# Altium PCB Main Board ECEshop.PcbDoc
Units mil, origin at the board's own origin, x right, y up, seen from the top; angles counter-clockwise.
Board outline 4000 x 4000 mil, 2 copper layers (Top Layer, Bottom Layer); 59 components, 70 nets, 303 pads, 77 vias.
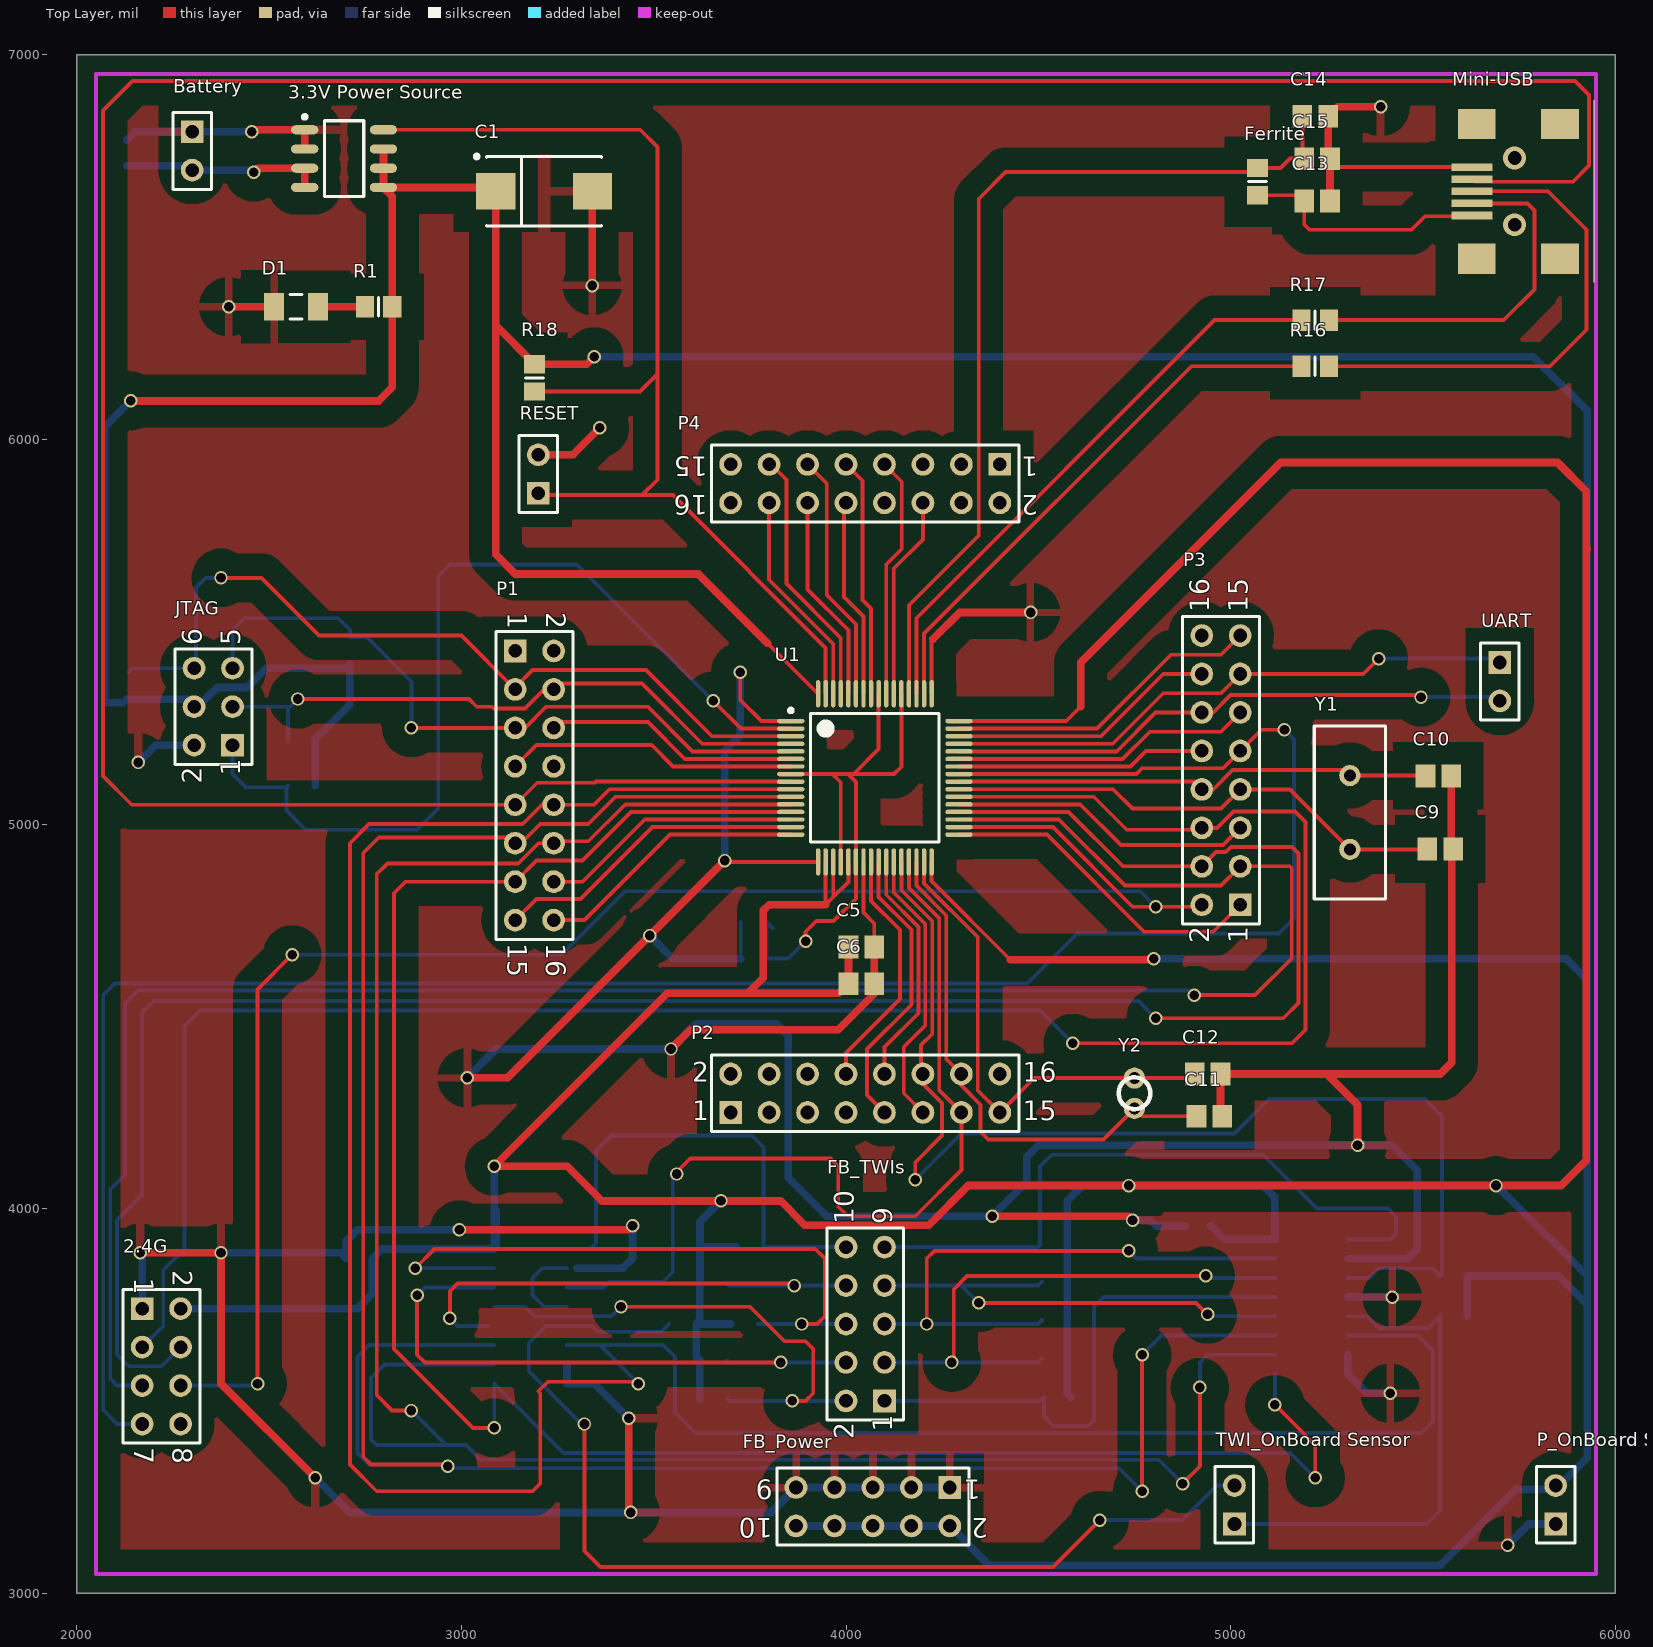
[diagram p0: Top Layer view]
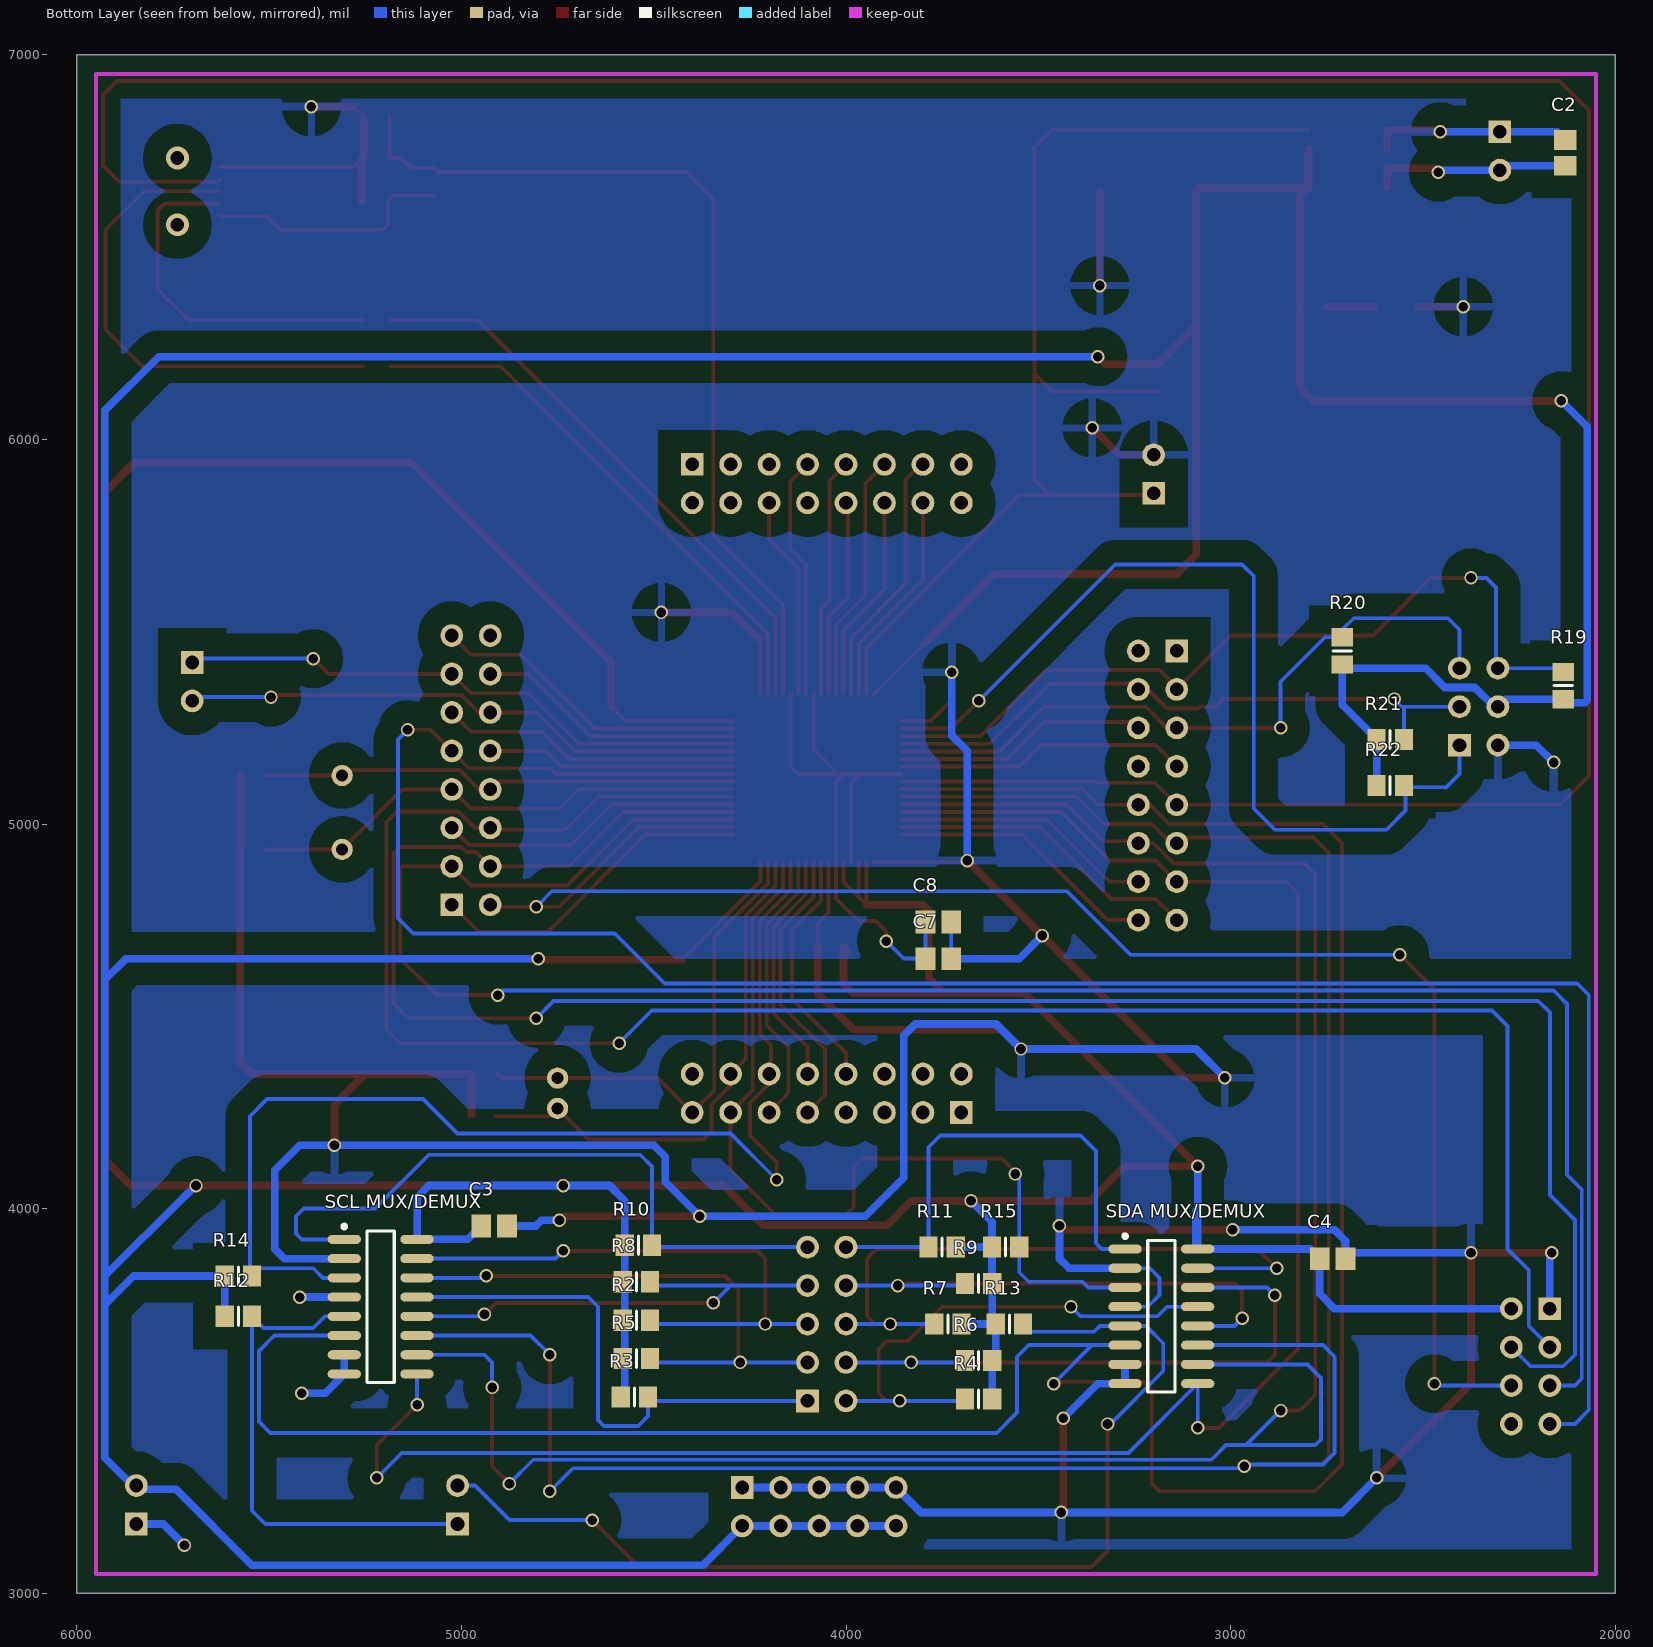
[diagram p1: Bottom Layer view, seen from below]

## Layer stack, top to bottom
Top Layer: signal copper 1.4
Dielectric: dielectric 12.6, FR-4, Dk 4.8
Bottom Layer: signal copper 1.4

## Board outline
2000,3000 6000,3000 6000,7000 2000,7000

## Design rules (kind name [scope] priority, off if disabled: settings)
Clearance "Polygon Clearance" [InPolygon] p1: gap=59.06
Clearance [All] p2: gap=8.1
HoleSize [All] p1: absolutevalues=TRUE maxlimit=100 minlimit=24 maxpercent=80.000 minpercent=20.000
MinimumSolderMaskSliver [All] p1 off: minsoldermaskwidth=10
PolygonConnect [All] p1: connectstyle=Relief reliefconductorwidth=20 reliefentries=4 polygonreliefangle="90 Angle"
RoutingVias [All] p1: holewidth=25 width=35 viastyle="Through Hole" minholewidth=25 minwidth=35 maxholewidth=25 maxwidth=35
SilkToSilkClearance [All] p1 off: silktosilkclearance=10
SilkscreenOverComponentPads [All] p1 off: minsilkscreentomaskgap=10
SolderMaskExpansion [All] p1: expansion=4
Width [All] p1: maxlimit=50 minlimit=8 preferedwidth=8
24 further rules are at their usual default settings.

## Classes and differential pairs
net class PB[11..0]: PB0 PB1 PB2 PB3 PB4 PB5 PB6 PB7 PB8 PB9 PB10 PB11
net class PA[31..0]: PA0 PA1 PA2 PA3 PA4 PA8 PA9 PA10 PA11 PA12 PA13 PA14 PA15 PA16 PA17 PA18 PA19 PA20 PA21 PA22 PA23 PA24 PA25 PA26 PA27 PA28 PA29 PA30 PA31
net class BUS_SEL[2..0]: BUS_SEL0 BUS_SEL1 BUS_SEL2
component class "U_Main Board": 2.4G C5 C6 C7 C8 C9 C10 C11 C12 C13 C14 C15 Ferrite JTAG Mini-USB R14 R15 R16 R17 R19 R20 R21 R22 RESET U1 UART Y1 Y2
component class U_I2C_BUS_MUX: C3 C4 FB_Power FB_TWIs "P_OnBoard Sensor" R2 R3 R4 R5 R6 R7 R8 R9 R10 R11 R12 R13 "SCL MUX/DEMUX" "SDA MUX/DEMUX" "TWI_OnBoard Sensor"
component class U_3: "3.3V Power Source" Battery C1 C2 D1 R1 R18
component class 3DMouseMainBoardAssembly: P1 P2 P3 P4

## Components (designator, comment, footprint, x,y, rotation, side; value= is the part's Value field where it differs from the comment)
2.4G "Header 4X2" HDR2X4 2170,3740 r270 top
"3.3V Power Source" "TPS7333Q" SOIC127P600-8BN 2695,6730 r0 top
Battery "Header 2" HDR1X2 2300,6800 r270 top
C1 "Cap Pol1" TC7343-2917 3215,6645 r0 top
C2 "Cap Semi" CAPC2012N 2130,6745 r270 bottom
C3 "Cap Semi" CAPC2012N 4915,3955 r0 bottom
C4 "Cap Semi" CAPC2012N 2735,3870 r0 bottom
C5 "Cap Semi" CAPC2012N 4040,4680 r180 top
C6 "Cap Semi" CAPC2012N 4040,4585 r180 top
C7 "Cap Semi" CAPC2012N 3760,4650 r0 bottom
C8 "Cap Semi" CAPC2012N 3760,4745 r0 bottom
C9 "Cap Semi" CAPC2012N 5545,4935 r180 top
C10 "Cap Semi" CAPC2012N 5540,5125 r180 top
C11 "Cap Semi" CAPC2012N 4945,4240 r180 top
C12 "Cap Semi" CAPC2012N 4940,4350 r180 top
C13 "Cap Semi" CAPC2012N 5225,6620 r0 top
C14 "Cap Semi" CAPC2012N 5220,6840 r0 top
C15 "Cap Semi" CAPC2012N 5225,6730 r0 top
D1 "LED2" RESC3216N 2570,6345 r180 top
FB_Power "Header 5X2" HDR2X5 4270,3275 r180 top
FB_TWIs "Header 5X2" HDR2X5 4100,3500 r90 top
Ferrite "Ferrite Bead" RESC2012N 5070,6670 r90 top
JTAG "Header 3X2" HDR2X3 2405,5205 r90 top
Mini-USB "Mini USB" "MINI USB" 5945,6645 r180 top
P1 "Header 1-16" HDR2X8 3140,5450 r270 top
P2 "Header 17-32" HDR2X8 3700,4250 r0 top
P3 "Header 33-48" HDR2X8 5025,4790 r90 top
P4 "Header 49-64" HDR2X8 4400,5935 r180 top
"P_OnBoard Sensor" "P_OnBoard Sensor" HDR1X2 5845,3180 r90 top
R1 "Res3" RESC2012N 2785,6345 r180 top
R2 "Res3" RESC2012N 4545,3710 r180 bottom
R3 "Res3" RESC2012N 4550,3510 r180 bottom
R4 "Res3" RESC2012N 3655,3505 r0 bottom
R5 "Res3" RESC2012N 4545,3610 r180 bottom
R6 "Res3" RESC2012N 3655,3605 r0 bottom
R7 "Res3" RESC2012N 3735,3700 r0 bottom
R8 "Res3" RESC2012N 4545,3810 r180 bottom
R9 "Res3" RESC2012N 3655,3805 r0 bottom
R10 "Res3" RESC2012N 4540,3905 r180 bottom
R11 "Res3" RESC2012N 3750,3900 r0 bottom
R12 "Res3" RESC2012N 5580,3720 r180 bottom
R13 "Res3" RESC2012N 3575,3700 r180 bottom
R14 "Res3" RESC2012N 5580,3825 r0 bottom
R15 "Res3" RESC2012N 3585,3900 r0 bottom
R16 "Res3" RESC2012N 5220,6190 r180 top
R17 "Res3" RESC2012N 5220,6310 r180 top
R18 "Res3" RESC2012N 3190,6160 r90 top
R19 "Res3" RESC2012N 2135,5360 r90 bottom
R20 "Res3" RESC2012N 2710,5450 r90 bottom
R21 "Res3" RESC2012N 2585,5220 r180 bottom
R22 "Res3" RESC2012N 2585,5100 r180 bottom
RESET "Header 2" HDR1X2 3200,5860 r90 top
"SCL MUX/DEMUX" "74LV4051" SOIC127P600-16N 5210,3745 r180 bottom
"SDA MUX/DEMUX" "74LV4051" SOIC127P600-16N 3180,3720 r180 bottom
"TWI_OnBoard Sensor" "TWI_OnBoard Sensor" HDR1X2 5010,3180 r90 top
U1 "AT32UC3B0256-A2UT" "TQFP64_N - ECESHOP" 4075,5120 r0 top
UART "Header 2" HDR1X2 5700,5420 r270 top
Y1 "XTAL 16Mhz" "HC-49U - Through Hole" 5310,5030 r270 top
Y2 "XTAL 32.768khz" XTAL32.768 4750,4300 r270 top

## Footprints (in the part's own frame and the unit in brackets; to place one, negate y for a bottom-side part, rotate by r counter-clockwise, add the part's x,y. Pads: shape width x height; smd on the part's side, far side on the other; paste and mask are expansions set on the pad)
CAPC2012N [mm] "Chip Capacitor, Body 2.0x1.3mm, IPC Medium Density"
  rect 1.3x1.5 smd: 1(-0.85,0) 2(0.85,0)
  body extent -1.1,-0.72 1.1,0.72, height 1.1
"HC-49U - Through Hole" [mm] "Quartz Crystal, Thru-Hole; 2 Leads; Body 11.35 x 4.65 x 13.46 mm (LxWxH max)"
  round 1.4 hole 0.8: 1(-2.44,0) 2(2.44,0)
  silkscreen extent -5.7,-2.35 5.7,2.35
HDR1X2 [mm] "Connector; Header; 2 Position"
  rect 1.5x1.5 hole 0.9: 1(0,0)
  round 1.5 hole 0.9: 2(2.54,0)
  silkscreen extent -1.27,-1.27 3.81,1.27
HDR2X3 [mm] "Connector; Header; 3x2 Position"
  rect 1.5x1.5 hole 0.9: 1(0,0)
  round 1.5 hole 0.9: 2(0,2.54) 3(2.54,0) 4(2.54,2.54) 5(5.08,0) 6(5.08,2.54)
  silkscreen extent -1.27,-1.27 6.35,3.81
HDR2X4 [mm] "Connector; Header; 4x2 Position"
  rect 1.5x1.5 hole 0.9: 1(0,0)
  round 1.5 hole 0.9: 2(0,2.54) 3(2.54,0) 4(2.54,2.54) 5(5.08,0) 6(5.08,2.54) 7(7.62,0) 8(7.62,2.54)
  silkscreen extent -1.27,-1.27 8.89,3.81
HDR2X5 [mm] "Connector; Header; 5x2 Position"
  rect 1.5x1.5 hole 0.9: 1(0,0)
  round 1.5 hole 0.9: 2(0,2.54) 3(2.54,0) 4(2.54,2.54) 5(5.08,0) 6(5.08,2.54) 7(7.62,0) 8(7.62,2.54) 9(10.16,0) 10(10.16,2.54)
  silkscreen extent -1.27,-1.27 11.43,3.81
HDR2X8 [mm] "Connector; Header; 8x2 Position"
  rect 1.5x1.5 hole 0.9: 1(0,0)
  round 1.5 hole 0.9: 2(0,2.54) 3(2.54,0) 4(2.54,2.54) 5(5.08,0) 6(5.08,2.54) 7(7.62,0) 8(7.62,2.54) 9(10.16,0) 10(10.16,2.54) 11(12.7,0) 12(12.7,2.54) 13(15.24,0) 14(15.24,2.54) 15(17.78,0) 16(17.78,2.54)
  silkscreen extent -1.27,-1.27 19.05,3.81
"MINI USB" [mm] "Digikey http://search.digikey.com/us/en/products/1734035-2/A31727CT-ND/773789"
  rect 2.7x0.5 smd: 1(8.05,1.6) 2(8.05,0.8) 3(8.05,0) 4(8.05,-0.8) 5(8.05,-1.6)
  rect 2.5x2 smd: NC(2.25,4.45) NC(2.25,-4.45) NC(7.75,-4.45) NC(7.75,4.45)
  silkscreen extent 0,-6 0,6
RESC2012N [mm] "Chip Resistor, Body 2.0x1.3mm, IPC Medium Density"
  rect 1.2x1.4 smd: 1(-0.9,0) 2(0.9,0)
  silkscreen extent 0,-0.6 0,0.6, body extent -1.07,-0.7 1.07,0.7, height 0.65
RESC3216N [mm] "Chip Resistor, Body 3.2x1.6mm, IPC Medium Density"
  rect 1.3x1.8 smd: 1(-1.45,0) 2(1.45,0)
  silkscreen extent -0.4,-0.8 0.4,0.8, body extent -1.68,-0.87 1.68,0.87, height 0.71
SOIC127P600-8BN [mm] "SOIC, 8-Leads, Body 4.9x3.9mm, Pitch 1.27mm, IPC Medium Density"
  oval 1.8x0.6 smd: 1(-2.6,1.905) 2(-2.6,0.635) 3(-2.6,-0.635) 4(-2.6,-1.905) 5(2.6,-1.905) 6(2.6,-0.635) 7(2.6,0.635) 8(2.6,1.905)
  silkscreen extent -2.72,-2.5 1.3,2.88, body extent -2,-2.5 2,2.5, height 2.59
SOIC127P600-16N [mm] "SOIC, 16-Leads, Body 9.9x3.9mm, Pitch 1.27mm, IPC Medium Density"
  oval 2.2x0.6 smd: 1(-2.4,4.445) 2(-2.4,3.175) 3(-2.4,1.905) 4(-2.4,0.635) 5(-2.4,-0.635) 6(-2.4,-1.905) 7(-2.4,-3.175) 8(-2.4,-4.445) 9(2.4,-4.445) 10(2.4,-3.175) 11(2.4,-1.905) 12(2.4,-0.635) 13(2.4,0.635) 14(2.4,1.905) 15(2.4,3.175) 16(2.4,4.445)
  silkscreen extent -2.53,-5 0.9,5.42, body extent -2,-5 2,5, height 1.75
TC7343-2917 [mm] "Capacitor, SM Tantalum; Body 7.3 x 4.3 mm (LxW typ)"
  rect 2.6x2.4 smd: 1(-3.2,0) 2(3.2,0)
  silkscreen extent -4.57,-2.3 3.8,2.42
"TQFP64_N - ECESHOP" [mm] "Thin QFP, 64-Leads, Body 10x10mm, Pitch 0.5mm, IPC Medium Density"
  oval 1.8x0.29 smd: 1(-5.55,3.75) 2(-5.55,3.25) 3(-5.55,2.75) 4(-5.55,2.25) 5(-5.55,1.75) 6(-5.55,1.25) 7(-5.55,0.75) 8(-5.55,0.25) 9(-5.55,-0.25) 10(-5.55,-0.75) 11(-5.55,-1.25) 12(-5.55,-1.75) 13(-5.55,-2.25) 14(-5.55,-2.75) 15(-5.55,-3.25) 16(-5.55,-3.75) 33(5.55,-3.75) 34(5.55,-3.25) 35(5.55,-2.75) 36(5.55,-2.25) 37(5.55,-1.75) 38(5.55,-1.25) 39(5.55,-0.75) 40(5.55,-0.25) 41(5.55,0.25) 42(5.55,0.75) 43(5.55,1.25) 44(5.55,1.75) 45(5.55,2.25) 46(5.55,2.75) 47(5.55,3.25) 48(5.55,3.75)
  oval 0.29x1.8 smd: 17(-3.75,-5.55) 18(-3.25,-5.55) 19(-2.75,-5.55) 20(-2.25,-5.55) 21(-1.75,-5.55) 22(-1.25,-5.55) 23(-0.75,-5.55) 24(-0.25,-5.55) 25(0.25,-5.55) 26(0.75,-5.55) 27(1.25,-5.55) 28(1.75,-5.55) 29(2.25,-5.55) 30(2.75,-5.55) 31(3.25,-5.55) 32(3.75,-5.55) 49(3.75,5.55) 50(3.25,5.55) 51(2.75,5.55) 52(2.25,5.55) 53(1.75,5.55) 54(1.25,5.55) 55(0.75,5.55) 56(0.25,5.55) 57(-0.25,5.55) 58(-0.75,5.55) 59(-1.25,5.55) 60(-1.75,5.55) 61(-2.25,5.55) 62(-2.75,5.55) 63(-3.25,5.55) 64(-3.75,5.55)
  silkscreen extent -5.67,-4.25 4.25,4.57, body extent -5,-5 5,5, height 1.2
XTAL32.768 [mm] "http://search.digikey.com/scripts/DkSearch/dksus.dll?WT.z_header=search_go&lang=en&site=us&keywords=535-9032-ND%09&x=0&y=0"
  round 1.4 hole 0.8: 1(-1,0) 2(1,0)
  silkscreen extent -1.05,-1.05 1.05,1.05

## Part data
2.4G: "Header, 4-Pin, Dual row"
Battery RESET UART: "Header, 2-Pin"
C1: "Polarized Capacitor (Radial)"
C2 C3 C4 C5 C6 C7 C8 C9 C10 C11 C12 C13 C14 C15: "Capacitor (Semiconductor SIM Model)"
D1: "Typical RED, GREEN, YELLOW, AMBER GaAs LED"
FB_Power FB_TWIs: "Header, 5-Pin, Dual row"
JTAG: "Header, 3-Pin, Dual row"
P1 P2 P3 P4: library part "Header 8X2", "Header, 8-Pin, Dual row"
"P_OnBoard Sensor" "TWI_OnBoard Sensor": library part "Header 2", "Header, 2-Pin"
R1 R2 R3 R4 R5 R6 R7 R8 R9 R10 R11 R12 R13 R14 R15 R16 R17 R18 R19 R20 R21 R22: "Resistor"
U1: "32-bit AVR UC3 B Series Microcontroller, 256KB Flash, 32KB SRAM, 44 GPIO pins, Industrial Grade, 64-Pin TQFP, Tray"
Y1 Y2: library part XTAL, "Crystal Oscillator"

## Via types
v1: diameter 35, hole 25, Top Layer to Bottom Layer, 75 vias
v2: diameter 59.06, hole 35.43, Top Layer to Bottom Layer, 2 vias

## Nets (pads, with @x,y where several pads share a name; then routed paths per layer and width w, separated by ;. In a path a pad name is that pad's centre, name@x,y a point inside that pad or via, vN(x,y) a via of type N, cw(c..) or ccw(c..) an arc to the next point about the centre after c; other vN are vias at no path point)
3.3VCC: 2.4G.2 "3.3V Power Source.5" "3.3V Power Source.6" "3.3V Power Source.7" "P_OnBoard Sensor.2" "SCL MUX/DEMUX.16" "SDA MUX/DEMUX.16" C1.1 C3.2 C4.2 C5.2 C6.2 FB_Power.2 FB_Power.4 FB_Power.6 FB_Power.8 FB_Power.10 JTAG.4 R1.1 R2.1 R3.1 R4.1 R5.1 R6.1 R7.1 R8.1 R9.1 R10.1 R11.1 R12.1 R13.1 R14.2 R15.2 R18.2 R19.1 R20.1 R21.1 R22.1 U1.18 U1.19 U1.21 U1.32 U1.48 U1.64 | length 27981.6
  Top Layer w10: 3795.87,5470 U1.64 ; U1.18 3947.05,4790.31 3966.73,4810 ; U1.19 3966.73,4810 ; U1.21 4006.1,4849.37 3966.73,4810 ; U1.32 4222.64,4851.54 4427.09,4647.09 ; U1.48 4572.64,5267.64 4610,5305
  Top Layer w20: v1(2140,6100) 2785,6100 2820.43,6135.43 R1.1 ; 2797.36,6755 2797.36,6705 2797.36,6655 ; R1.1@2820.43,6355 2820.43,6631.93 2797.36,6655 ; v1(3345,6215) 3325.43,6195.43 R18.2 3089.02,6296.42 ; 3795.87,5470 3615.87,5650 3140,5650 3089.02,5700.98 3089.02,6296.42 ; 3947.05,4790.31 3800.32,4790.31 3785,4775 3785,4600 3745,4560 ; C5.2@3996.54,4670 C5.2 C6.2 3981.54,4560 3745,4560 ; 4427.09,4647.09 4797.09,4647.09 v1(4800,4650) ; 4610,5305 4610,5420 5130,5940 5850,5940 5925,5865 5925,5716.9 ; 5926.9,5715 5925,5716.9 ; 2797.36,6655 3079.02,6655 C1.1 3089.02,6296.42 ; 3745,4560 3535,4560 v1(3085,4110) 3275,4110 3365,4020 v1(3675,4020) 3830,4020 3893.1,3956.9 4215,3956.9 4318.1,4060 v1(4735,4060) v1(5690,4060) 5860,4060 5925,4125 5925,5716.9
  Bottom Layer w20: v1(2140,6100) 2073.1,6033.1 2073.1,5321.9 2080,5315 2119.52,5315 2129.09,5324.57 R19.1 2285.43,5324.57 JTAG.4 2315,5305 2365,5355 2443.1,5355 2493.1,5405 2700.43,5405 R20.1 2710,5309.57 R21.1 R22.1 ; 2.4G.2 2730,3740 2768.46,3778.46 C4.2 2793.46,3895 3085.51,3895 ; v1(3085,4110) 3085.51,4109.49 3085.51,3895 ; 3090,3995 3090,3899.49 3085.51,3895 ; v1(3345,6215) 5786.9,6215 5926.9,6075 5926.9,4595 ; R4.1 R6.1 3610.43,3614.13 R13.1 ; R15.2@3619.57,3899.13 R15.2 ; v1(3675,4020) 3620.43,3965.43 R15.2 ; R7.1 R13.1 ; R11.1 R15.2 ; FB_Power.10 FB_Power.8 FB_Power.6 FB_Power.4 FB_Power.2 4371.9,3073.1 5545,3073.1 5741.9,3270 5845,3270 5926.9,3351.9 5926.9,3750 ; R3.1 4575.43,3520 R10.1 4575.43,4020.43 4615,4060 v1(4735,4060) 5085,4060 5115,4030 5115,3920.51 5115.51,3920 4983.46,3920 C3.2 ; v1(4800,4650) 5871.9,4650 5926.9,4595 ; R12.1 R14.2 5851.9,3825 5926.9,3750 ; v1(5690,4060) 5710,4040 ; R13.1 3619.57,3709.13 R9.1 3620.43,3805.87 R15.2 ; 5710,4040 5716.55,4033.45 5718.45,4033.45 ; 5710,4040 5711.9,4040 5718.45,4033.45 ; 5718.45,4033.45 5926.9,3825 ; 5926.9,3750 5926.9,3825 ; 5926.9,3825 5926.9,4595
BUS_SEL0: "SCL MUX/DEMUX.11" "SDA MUX/DEMUX.11" P1.11 U1.11 | length 6405.2
  Top Layer w10: v1(2965,3330) 2960,3335 2765,3335 2745,3355 2745,4925 2785,4965 3125,4965 P1.11 3155,4950 3205,5000 3330,5000 3400.79,5070.79 U1.11 ; v1(4770,3265) v1(4770,3620)
  Bottom Layer w10: 3085.51,3645 2760,3645 2730,3615 2730,3365 2760,3335 2960,3335 v1(2965,3330) 2970,3325 4710,3325 v1(4770,3265) ; v1(4770,3620) 4820,3670 5115.51,3670
BUS_SEL1: "SCL MUX/DEMUX.10" "SDA MUX/DEMUX.10" P1.12 U1.12 | length 5930.4
  Top Layer w10: v1(2870,3475) 2820,3475 2780,3515 2780,4870 2807.5,4897.5 3147.78,4897.5 3200.28,4950 P1.12 3245,4955 3330,4955 3426.1,5051.1 U1.12 ; v1(4875,3285) 4920,3330 v1(4920,3535)
  Bottom Layer w10: v1(2870,3475) 2960,3385 ; 3085.51,3595 2800,3595 2765,3560 2765,3400 2780,3385 2960,3385 ; v1(4875,3285) 4813.1,3346.9 3050,3346.9 3011.9,3385 2960,3385 ; v1(4920,3535) 4920,3600 4940,3620 5115.51,3620
BUS_SEL2: "SCL MUX/DEMUX.9" "SDA MUX/DEMUX.9" P1.13 U1.13 | length 5313.9
  Top Layer w10: v1(3085,3430) 3030,3430 2825,3635 2825,4820 2855,4850 P1.13 3195,4905 3315,4905 3441.42,5031.42 U1.13 ; v1(5115,3490) 5220,3385 v1(5220,3300)
  Bottom Layer w10: v1(3085,3430) 3085.51,3430.51 3085.51,3545 3265.51,3365 5155,3365 v1(5220,3300) ; v1(5115,3490) 5115,3569.49 5115.51,3570
GND: 2.4G.1 "3.3V Power Source.1" "3.3V Power Source.2" "P_OnBoard Sensor.1" "SCL MUX/DEMUX.2" "SCL MUX/DEMUX.4" "SCL MUX/DEMUX.7" "SCL MUX/DEMUX.8" "SDA MUX/DEMUX.2" "SDA MUX/DEMUX.4" "SDA MUX/DEMUX.7" "SDA MUX/DEMUX.8" Battery.1 C1.2 C2.1 C3.1 C4.1 C5.1 C6.1 C7.1 C8.1 C9.1 C10.1 C11.1 C12.1 C13.2 C14.2 C15.2 D1.2 FB_Power.1 FB_Power.3 FB_Power.5 FB_Power.7 FB_Power.9 JTAG.2 Mini-USB.5 RESET.2 U1.1 U1.17 U1.23 U1.49 | length 16591.2
  Top Layer w10: v1@3685,4901.5 U1.17 ; v1(3725,5395) 3725,5322.64 3780,5267.64 U1.1 ; U1.23 4045.47,4769.53 4073.46,4741.54 C5.1 ; U1.49 4222.64,5476.59 4226.05,5480 ; C11.1@4973.46,4245 C11.1 ; C15.2@5253.46,6735 C15.2 5280.47,6707.99 Mini-USB.5 ; C14.2 C14.2@5278.46,6865 ; C9.1@5573.46,4940 5575,4938.46 C9.1
  Top Layer w20: v1(2165,3885) v1(2375,3885) 2375,3545 v1(2620,3300) ; v1(2395,6345) D1.2 ; v1(2455,6800) 2460,6805 2592.64,6805 2592.64,6755 ; v1(2995,3945) 3435,3945 v1(3445,3955) ; v1(3015,4340) 3120,4340 v1(3490,4710) v1(3685,4905) ; RESET.2 3290,5960 v1(3360,6030) ; v1(3340,6400) 3340,6644.02 C1.2 ; v1(3435,3455) 3435,3215 v1(3440,3210) ; v1(3545,4415) 3595,4465 3980,4465 4073.46,4558.46 C6.1 C5.1 ; 4226.05,5481.05 4226.05,5480 4296.05,5550 v1(4480,5550) ; v1(4380,3980) 4735,3980 v1(4745,3970) ; C11.1@4973.46,4245 C12.1 5250,4350 ; C15.2@5253.46,6735 C14.2 ; C13.2 C15.2 ; C14.2@5278.46,6865 v1(5390,6865) ; v1(5330,4165) 5330,4270 5250,4350 ; C9.1@5573.46,4940 C10.1 ; C9.1@5575,4938.46 5575,4380 5545,4350 5250,4350
  Bottom Layer w10: 3274.49,3745 3215.6,3745 3185,3775.6 3185,3820 3210,3845 3274.49,3845 ; C7.1 C8.1
  Bottom Layer w20: C2.1 2151.54,6800 Battery.1 v1(2455,6800) ; v1(2160,5160) 2205,5205 JTAG.2 ; v1(2165,3885) 2170,3880 2.4G.1 ; v1(2375,3885) 2686.54,3885 C4.1 2701.54,3916.54 2730,3945 v1(2995,3945) ; v1(2620,3300) 2710,3210 3420,3210 ; v1(3015,4340) 3090,4415 v1(3545,4415) 3610,4480 3820,4480 3850,4450 3850,4080 3950,3980 v1(4380,3980) 4470,4070 4470,4135 4500,4165 v1(5330,4165) 5420,4165 5485,4100 5485,3895 5460,3870 5304.49,3870 ; 3274.49,3595 3274.49,3545 3345,3545 v1(3435,3455) ; 3300,3845 3420,3845 3445,3870 v1(3445,3955) ; v1(3440,3210) 3805,3210 FB_Power.9 FB_Power.7 FB_Power.5 FB_Power.3 FB_Power.1 ; v1(3490,4710) 3550,4650 C7.1 ; v1(3685,4905) 3685,5190 3725,5230 v1(3725,5395) ; v1(4745,3970) 4791.54,3970 4806.54,3955 C3.1 ; 5304.49,3620 5304.49,3570 5354.49,3520 v1(5415,3520) ; 5304.49,3770 v1(5420,3770) ; v1(5720,3125) 5775,3180 5845,3180
IRQ: 2.4G.8
JTAG_TCK: JTAG.1 R22.2 U1.2 | length 2445.9
  Top Layer w10: v1(3655,5320) 3727.05,5247.95 U1.2
  Bottom Layer w10: JTAG.1 2405,5130 2440,5095 2440.43,5095.43 R22.2@2545,5095.43 ; R22.2 R22.2@2545,5095.43 ; v1(3655,5320) 3300,5675 2970,5675 2940,5645 2940,5040 2885,4985 2595,4985 2545,5035 R22.2@2545,5095.43
NetC7_2: C7.2 C8.2 U1.8 U1.20 U1.22 U1.53 U1.56 | length 1717.9
  Top Layer w10: U1.8 3965.16,5129.84 ; v1(3895,4695) 3895,4720 3922.5,4747.5 3967.5,4747.5 4025.79,4805.79 U1.22 4025.79,5109.06 4005,5129.84 ; U1.20 3986.42,5108.58 3965.16,5129.84 ; U1.56 4084.84,5194.69 4020,5129.84 ; U1.53 4143.9,5148.9 4124.84,5129.84 4020,5129.84 ; 3965.16,5129.84 4005,5129.84 ; 4005,5129.84 4020,5129.84
  Bottom Layer w10: C8.2@3808.46,4730 C8.2 C7.2 3850,4650 v1(3895,4695)
NetC13_1: C13.1 Ferrite.1 Mini-USB.1 | length 646.5
  Top Layer w10: Ferrite.1 5176.97,6634.57 C13.1 5191.54,6558.46 5205,6545 5470,6545 5505,6580 5626.06,6580 Mini-USB.1
NetD1_1: D1.1 R1.2 | length 122.5
  Top Layer w20: D1.1 R1.2
NetR16_2: R16.2 U1.50 | length 1426
  Top Layer w10: U1.50 4202.95,5495 4897.95,6190 R16.2
NetR17_2: R17.2 U1.51 | length 1518.8
  Top Layer w10: U1.51 4183.27,5535 4958.27,6310 R17.2
PA0: JTAG.6 P1.3 R19.2 U1.3 | length 2157.8
  Top Layer w10: v1(2375,5640) 2480,5640 2630,5490 3000,5490 P1.3 3140,5355 3185,5400 3480,5400 3651.73,5228.27 U1.3
  Bottom Layer w10: R19.2 2144.57,5405 JTAG.6 2310,5410 2310,5615 2335,5640 v1(2375,5640)
PA1: JTAG.3 P1.4 R21.2 U1.4 | length 1649.1
  Top Layer w10: v1(2575,5325) 3020,5325 3040,5305 3080,5305 3085,5300 3165,5300 3215,5350 P1.4 3255,5365 3470,5365 3626.42,5208.58 U1.4
  Bottom Layer w10: JTAG.3 2555,5305 ; R21.2 2549.57,5299.57 2555,5305 ; v1(2575,5325) 2555,5305
PA2: JTAG.5 P1.5 R20.2 U1.5 | length 1834.6
  Top Layer w10: v1(2870,5250) P1.5 3165,5250 3220,5305 3485,5305 3601.1,5188.9 U1.5
  Bottom Layer w10: JTAG.5 2405,5505 2435,5535 2680,5535 2710,5505 R20.2 2754.57,5485.43 2865,5375 2870,5370 v1(2870,5250)
PA3: Mini-USB.4 P1.9 U1.9 | length 7992.3
  Top Layer w10: U1.9 3350,5110.16 3347.21,5107.37 3197.37,5107.37 P1.9 2143.1,5050 2068.1,5125 2068.1,6855 2145,6931.9 5895,6931.9 5931.9,6895 5931.9,6711.9 5890,6670 5634.57,6670 Mini-USB.4
PA4: "SCL MUX/DEMUX.6" "SDA MUX/DEMUX.6" P1.10 U1.10 | length 6873.6
  Top Layer w10: v1(3460,3545) 3455,3550 3225,3550 3200,3525 3205,3520 3205,3285 3185,3265 2780,3265 2710,3335 2710,4950 2760,5000 3159.4,5000 3209.4,5050 P1.10 3345,5050 3385.47,5090.47 U1.10
  Bottom Layer w10: 3274.49,3645 3360,3645 ; v1(3460,3545) 3360,3645 ; 5304.49,3670 5486.47,3670 5526.47,3630 5526.47,3446.47 5496.9,3416.9 3608.1,3416.9 3555,3470 3555,3615 3525,3645 3360,3645
PA8: P1.14 U1.14 | length 683.5
  Top Layer w10: P1.14 3315,4850 3476.73,5011.73 U1.14
PA9: "SCL MUX/DEMUX.3" P2.12 R14.1 U1.28 | length 3075.3
  Top Layer w10: U1.28 4143.9,4827.89 4224.3,4747.49 4224.3,4454.3 4195,4425 4195,4355 P2.12 4200,4324.4 4250,4274.4 4250,4190 4180,4120 v1(4180,4075)
  Bottom Layer w10: v1(4180,4075) 4300,4195 5010,4195 5100,4285 5505,4285 5550,4240 5550,3830.43 R14.1 5524.57,3845 5385,3845 5360,3820 5304.49,3820
PA10: "SDA MUX/DEMUX.3" P2.13 R15.1 U1.29 | length 2342.1
  Top Layer w10: v1(3560,4090) 3560,4095 3595,4130 3960,4130 3980,4110 3980,4005 4005,3980 4180,3980 4300,4100 P2.13 4242.63,4307.37 4242.63,4754.76 4163.58,4833.81 U1.29
  Bottom Layer w10: 3274.49,3795 3370,3795 3385,3810 3525,3810 3549.57,3834.57 R15.1 3549.57,4079.57 v1(3560,4090)
PA11: C11.2 P2.14 U1.30 Y2.2 | length 1382.3
  Top Layer w10: U1.30 4183.27,4839.72 4260.73,4762.26 4260.73,4389.27 P2.14 4300,4320 4350,4270 4350,4200 4370,4180 4669.37,4180 Y2.2 4770.63,4240 C11.2
PA12: C12.2 P2.15 U1.31 Y2.1 | length 1281.1
  Top Layer w10: U1.31 4202.95,4845.63 4342.63,4705.96 4342.63,4307.37 P2.15 4489.37,4339.37 Y2.1 4895.91,4339.37 C12.2
PA13: P3.1 U1.33 | length 865
  Top Layer w10: U1.33 4522.64,4972.36 4775,4720 4955,4720 P3.1
PA14: 2.4G.6 P3.2 U1.34 | length 4403.6
  Top Layer w10: v1(2470,3545) 2470,4570 v1(2560,4660) ; U1.34 4537.95,4992.05 4745,4785 v1(4805,4785) 4920,4785 P3.2
  Bottom Layer w10: 2.4G.6 2465,3540 v1(2470,3545) ; v1(2560,4660) 3260,4660 3425,4825 4765,4825 v1(4805,4785)
PA15: 2.4G.5 P3.3 U1.35 | length 5367
  Top Layer w10: U1.35 4553.27,5011.73 4725,4840 4975,4840 P3.3 5153.8,4890 5158.8,4885 5158.8,4650 5063.8,4555 v1(4905,4555)
  Bottom Layer w10: 2.4G.5 2105,3540 2086.9,3558.1 2086.9,4050 2125,4088.1 2125,4531.9 2160,4566.9 4893.1,4566.9 v1(4905,4555)
PA16: 2.4G.4 P3.4 U1.36 | length 5527.4
  Top Layer w10: U1.36 4578.58,5031.42 4720,4890 P3.4 4961.9,4926.9 4987.5,4926.9 5000.6,4940 5160,4940 5176.9,4923.1 5176.9,4535 5136.9,4495 v1(4805,4495)
  Bottom Layer w10: 2.4G.4 2220,3590 2135,3590 2105,3620 2105,3970 2170,4035 2170,4510 2200,4540 4445,4540 4445.6,4539.4 4760.6,4539.4 v1(4805,4495)
PA17: P3.5 U1.37 | length 794.1
  Top Layer w10: U1.37 4608.9,5051.1 4715,4945 4980,4945 P3.5
PA18: C9.2 P3.7 U1.39 Y1.2 | length 1324.7
  Top Layer w10: U1.39 4694.53,5090.47 4745,5040 4975,5040 P3.7 5153.94,5090 Y1.2 5510.47,4933.94 C9.2
PA19: C10.2 P3.8 U1.40 Y1.1 | length 1248.3
  Top Layer w10: U1.40 4904.84,5110.16 P3.8 4955,5090 5005,5140 5296.06,5140 Y1.1 5505.47,5126.06 C10.2
PA20: P3.12 U1.44 UART.2 | length 1473.2
  Top Layer w10: U1.44 4703.9,5188.9 4805,5290 P3.12 4955,5290 5000,5335 5490,5335 v1(5495,5330)
  Bottom Layer w10: v1(5495,5330) 5690,5330 UART.2
PA21: P3.13 U1.45 UART.1 | length 1502.4
  Top Layer w10: U1.45 4693.58,5208.58 4825,5340 4975,5340 P3.13 5345,5390 v1(5385,5430)
  Bottom Layer w10: v1(5385,5430) 5690,5430 UART.1
PA22: P3.14 U1.46 | length 698.5
  Top Layer w10: U1.46 4663.27,5228.27 4825,5390 P3.14
PA23: P3.15 U1.47 | length 831.8
  Top Layer w10: U1.47 4652.95,5247.95 4845,5440 4975,5440 P3.15
PA24: P4.11 U1.59 | length 648.6
  Top Layer w10: P4.11 3950,5885 3950,5595 4025.79,5519.21 U1.59
PA25: P4.12 U1.60 | length 540.4
  Top Layer w10: P4.12 3900,5610 4006.1,5503.9 U1.60
PA26: P4.13 U1.61 | length 676.6
  Top Layer w10: P4.13 3805,5935 3845,5895 3845,5625 3986.42,5483.58 U1.61
PA27: P4.14 U1.62 | length 565.6
  Top Layer w10: P4.14 3800,5635 3966.73,5468.27 U1.62
PA28: 2.4G.7 P3.9 U1.41 | length 5768.6
  Top Layer w10: U1.41 4754.84,5129.84 4770,5145 4980,5145 P3.9 5080,5245 v1(5140,5245)
  Bottom Layer w10: 2.4G.7 2105,3440 2068.8,3476.2 2068.8,4555 2098.8,4585 4471.3,4585 4601.3,4715 5125,4715 5165,4755 5165,5220 v1(5140,5245)
PA29: P3.10 U1.42 | length 648.3
  Top Layer w10: U1.42 4739.53,5149.53 4780,5190 P3.10
PA30: P1.15 U1.15 | length 816.8
  Top Layer w10: P1.15 3195,4805 3310,4805 3497.05,4992.05 U1.15
PA31: P1.16 U1.16 | length 708.6
  Top Layer w10: P1.16 3320,4750 3542.36,4972.36 U1.16
PB0: P1.6 U1.6 | length 662.4
  Top Layer w10: P1.6 3255,5265 3485,5265 3580.79,5169.21 U1.6
PB1: P1.7 U1.7 | length 762.3
  Top Layer w10: P1.7 3195,5205 3495,5205 3550.47,5149.53 U1.7
PB2: P2.8 U1.24 | length 640.5
  Top Layer w10: P2.8 4000,4405 4140,4545 4140,4725 4065.16,4799.84 U1.24
PB3: P2.9 U1.25 | length 753
  Top Layer w10: U1.25 4084.84,4810.16 4170,4725 4170,4530 4055,4415 4055,4295 P2.9
PB4: P2.10 U1.26 | length 622.6
  Top Layer w10: P2.10 4100,4420 4188.1,4508.1 4188.1,4732.5 4104.53,4816.07 U1.26
PB5: P2.11 U1.27 | length 729.4
  Top Layer w10: U1.27 4124.21,4821.98 4206.2,4739.99 4206.2,4476.2 4150,4420 4150,4300 P2.11
PB6: 2.4G.3 P3.6 U1.38 | length 5370
  Top Layer w10: U1.38 4644.21,5070.79 4730,4985 4920,4985 P3.6 4964.72,4990 5007.34,5032.63 5167.37,5032.63 5195,5005 5195,4465 5160,4430 v1(4590,4430)
  Bottom Layer w10: 2.4G.3 2225,3695 2225,3840 2280,3895 2280,4475 2320,4515 4505,4515 v1(4590,4430)
PB7: P3.11 U1.43 | length 781.5
  Top Layer w10: U1.43 4719.21,5169.21 4790,5240 4975,5240 P3.11
PB8: P4.6 U1.54 | length 527.9
  Top Layer w10: U1.54 4124.21,5664.21 4200,5740 P4.6
PB9: P4.7 U1.55 | length 631.9
  Top Layer w10: P4.7 4145,5890 4145,5715 4104.53,5674.53 U1.55
PB10: P4.9 U1.57 | length 623.5
  Top Layer w10: P4.9 4042.63,5892.37 4042.63,5582.37 4065.16,5559.84 U1.57
PB11: P4.10 U1.58 | length 519.5
  Top Layer w10: P4.10 3995,5830 3995,5590 4045.47,5539.53 U1.58
RESET_N: "3.3V Power Source.8" R18.1 RESET.1 U1.63 | length 3024.7
  Top Layer w10: 2797.36,6805 3465,6805 3510,6760 3510,6170 ; R18.1 3464.57,6124.57 3510,6170 ; RESET.1 3205,5855 3290,5855 3470,5855 ; U1.63 3947.05,5457.95 3550,5855 3470,5855 ; 3470,5855 3510,5895 3510,6170
TWI0_0: "SCL MUX/DEMUX.13" FB_TWIs.1 R3.2 | length 1391.3
  Bottom Layer w10: FB_TWIs.1 4504.57,3500 R3.2 4514.57,3460.43 4540,3435 4630,3435 4645,3450 4645,3745 4670,3770 5115.51,3770
TWI0_1: "SDA MUX/DEMUX.13" FB_TWIs.2 R4.2 | length 1385.6
  Top Layer w10: v1(3415,3745) 3750,3745 3840,3655 3895,3655 3915,3635 3915,3520 3895,3500 v1(3860,3500)
  Bottom Layer w10: 3085.51,3745 3165,3745 3189.91,3720.09 3390.09,3720.09 v1(3415,3745) ; R4.2 3695.43,3500 v1(3860,3500) FB_TWIs.2
TWI1_0: "SCL MUX/DEMUX.14" FB_TWIs.3 R5.2 | length 1457.9
  Top Layer w10: v1(4275,3600) 4280,3605 4280,3790 4315,3825 v1(4935,3825)
  Bottom Layer w10: FB_TWIs.3 v1(4275,3600) 4499.57,3600 R5.2 ; v1(4935,3825) 4940,3820 5115.51,3820
TWI1_1: "SDA MUX/DEMUX.14" FB_TWIs.4 R6.2 | length 1628.7
  Top Layer w10: v1(2885,3775) 2885,3620 2905,3600 v1(3830,3600)
  Bottom Layer w10: v1(2885,3775) 2905,3795 3085.51,3795 ; R6.2 3695.43,3600 v1(3830,3600) FB_TWIs.4
TWI2_0: "SCL MUX/DEMUX.15" FB_TWIs.5 R2.2 | length 1505.8
  Top Layer w10: v1(4210,3700) 4210,3870 4230,3890 v1(4735,3890)
  Bottom Layer w10: FB_TWIs.5 v1(4210,3700) 4499.57,3700 R2.2 ; v1(4735,3890) 4755,3870 5115.51,3870
TWI2_1: "SDA MUX/DEMUX.15" FB_TWIs.6 R7.2 | length 1749.4
  Top Layer w10: v1(2880,3845) 2930,3895 3920,3895 3945,3870 3945,3720 3925,3700 v1(3885,3700)
  Bottom Layer w10: v1(2880,3845) 3085.51,3845 ; R7.2 v1(3885,3700) FB_TWIs.6
TWI3_0: "SCL MUX/DEMUX.12" FB_TWIs.7 R8.2 | length 1260.3
  Top Layer w10: v1(4345,3755) 4910,3755 v1(4940,3725)
  Bottom Layer w10: FB_TWIs.7 4305,3800 ; v1(4345,3755) 4305,3795 4305,3800 ; R8.2 4499.57,3800 4305,3800 ; v1(4940,3725) 4945,3720 5115.51,3720
TWI3_1: "SDA MUX/DEMUX.12" FB_TWIs.8 R9.2 | length 1395.3
  Top Layer w10: v1(2970,3715) 2970,3785 2990,3805 3860,3805 v1(3865,3800)
  Bottom Layer w10: v1(2970,3715) 2990,3695 3070,3695 ; R9.2 3695.43,3800 v1(3865,3800) FB_TWIs.8
TWI4_0: "SCL MUX/DEMUX.1" FB_TWIs.9 R10.2 | length 1792.2
  Bottom Layer w10: FB_TWIs.9 4499.57,3900 R10.2 4504.57,4109.57 4535,4140 5084.49,4140 5224.49,4000 5410,4000 5430,3980 5430,3935 5415,3920 5304.49,3920
TWI4_1: "SDA MUX/DEMUX.1" FB_TWIs.10 R11.2 | length 1260.5
  Bottom Layer w10: 3274.49,3895 3335,3895 3350,3910 3350,4150 3390,4190 3755,4190 3785.43,4159.57 R11.2 FB_TWIs.10
TWI5_0: "SCL MUX/DEMUX.5" "TWI_OnBoard Sensor.1" R12.2 | length 1319.6
  Bottom Layer w10: 5010,3180 5510,3180 5545,3215 5544.57,3215.43 R12.2 5514.57,3690 5385,3690 5355,3720 5304.49,3720
TWI5_1: "SDA MUX/DEMUX.5" "TWI_OnBoard Sensor.2" R13.2 | length 2797.1
  Top Layer w10: v1(3320,3440) 3320,3110 3361.9,3068.1 4538.1,3068.1 v1(4660,3190)
  Bottom Layer w10: v1(3320,3440) 3312.76,3440 3175,3577.76 3175,3650 3220,3695 3274.49,3695 3340,3695 3355,3680 3519.57,3680 R13.2 ; v1(4660,3190) 4875,3190 4965,3280 5010,3280
USBDM: Mini-USB.2 R17.1 | length 942.3
  Top Layer w10: R17.1 5710,6310 5790,6390 5790,6595 5771.5,6613.5 Mini-USB.2
USBDP: Mini-USB.3 R16.1 | length 1307.3
  Top Layer w10: R16.1 5830,6190 5925,6285 5925,6545 5825,6645 Mini-USB.3
VBUS: C14.1 C15.1 Ferrite.2 U1.52 | length 2363.7
  Top Layer w10: U1.52 4163.58,5568.58 4345,5750 4345,6625 4415,6695 5059.57,6695 Ferrite.2 5130,6705.43 5154.57,6730 C15.1 5186.54,6735 C14.1
VIN: "3.3V Power Source.3" "3.3V Power Source.4" Battery.2 C2.2 | length 523.6
  Top Layer w20: v1(2460,6695) 2470,6705 2592.64,6705 2592.64,6655
  Bottom Layer w20: C2.2 2288.46,6711.54 Battery.2 2455,6700 v1(2460,6695)
pads on no net: Mini-USB.NC P1.1 P1.2 P1.8 P2.1 P2.2 P2.3 P2.4 P2.5 P2.6 P2.7 P2.16 P3.16 P4.1 P4.2 P4.3 P4.4 P4.5 P4.8 P4.15 P4.16
copper on no net:
  other v2: 5738.31,6558.39 5738.31,6731.61

## Polygon pours and split planes (outlines as drawn)
GND on Bottom Layer "Top Layer-No Net" (solid, pour order 4): 2025,6975 5975,6975 5975,3025 2025,3025
GND on Top Layer "Top Layer-No Net" (solid, pour order 2): 2025,6975 5975,6975 5975,3025 2025,3025

## Keep-outs
Keep-Out Layer:
  lines w10: 2050,3050 5950,3050 5950,6950 2050,6950 2050,3050

## Dimensions
2050,3050 to 5950,3050 on Mechanical 1
2050,3050 to 2050,6950 on Mechanical 1

## Text inside footprints (layer, text, board x,y; h text height)
2.4G: Top Overlay "2" at 2250,3840 h50 r270; Top Overlay "1" at 2150,3820 h50 r270; Top Overlay "7" at 2150,3380 h50 r270; Top Overlay "8" at 2250,3380 h50 r270
FB_Power: Top Overlay "10" at 3810,3195 h50 r180; Top Overlay "9" at 3810,3295 h50 r180; Top Overlay "1" at 4350,3295 h50 r180; Top Overlay "2" at 4370,3195 h50 r180
FB_TWIs: Top Overlay "10" at 4020,3960 h50 r90; Top Overlay "9" at 4120,3960 h50 r90; Top Overlay "1" at 4120,3420 h50 r90; Top Overlay "2" at 4020,3400 h50 r90
JTAG: Top Overlay "6" at 2325,5465 h50 r90; Top Overlay "5" at 2425,5465 h50 r90; Top Overlay "2" at 2325,5105 h50 r90; Top Overlay "1" at 2425,5125 h50 r90
P1: Top Overlay "2" at 3220,5550 h50 r270; Top Overlay "1" at 3120,5550 h50 r270; Top Overlay "15" at 3120,4690 h50 r270; Top Overlay "16" at 3220,4690 h50 r270
P2: Top Overlay "2" at 3600,4330 h50; Top Overlay "1" at 3600,4230 h50; Top Overlay "15" at 4460,4230 h50; Top Overlay "16" at 4460,4330 h50
P3: Top Overlay "2" at 4945,4690 h50 r90; Top Overlay "1" at 5045,4690 h50 r90; Top Overlay "15" at 5045,5550 h50 r90; Top Overlay "16" at 4945,5550 h50 r90
P4: Top Overlay "2" at 4500,5855 h50 r180; Top Overlay "1" at 4500,5955 h50 r180; Top Overlay "15" at 3640,5955 h50 r180; Top Overlay "16" at 3640,5855 h50 r180